# Altium PCB JacdacDevRgbEc30 117.PcbDoc (part 1 of 2)
Units mm, origin at the board's own origin, x right, y up, seen from the top; angles counter-clockwise.
Board outline 28 x 25 mm, 2 copper layers (Top Layer, Bottom Layer), stack 1.525 mm thick; 29 components, 28 nets, 109 pads, 40 vias.
Unrouted connection lines stored in the file: 10.
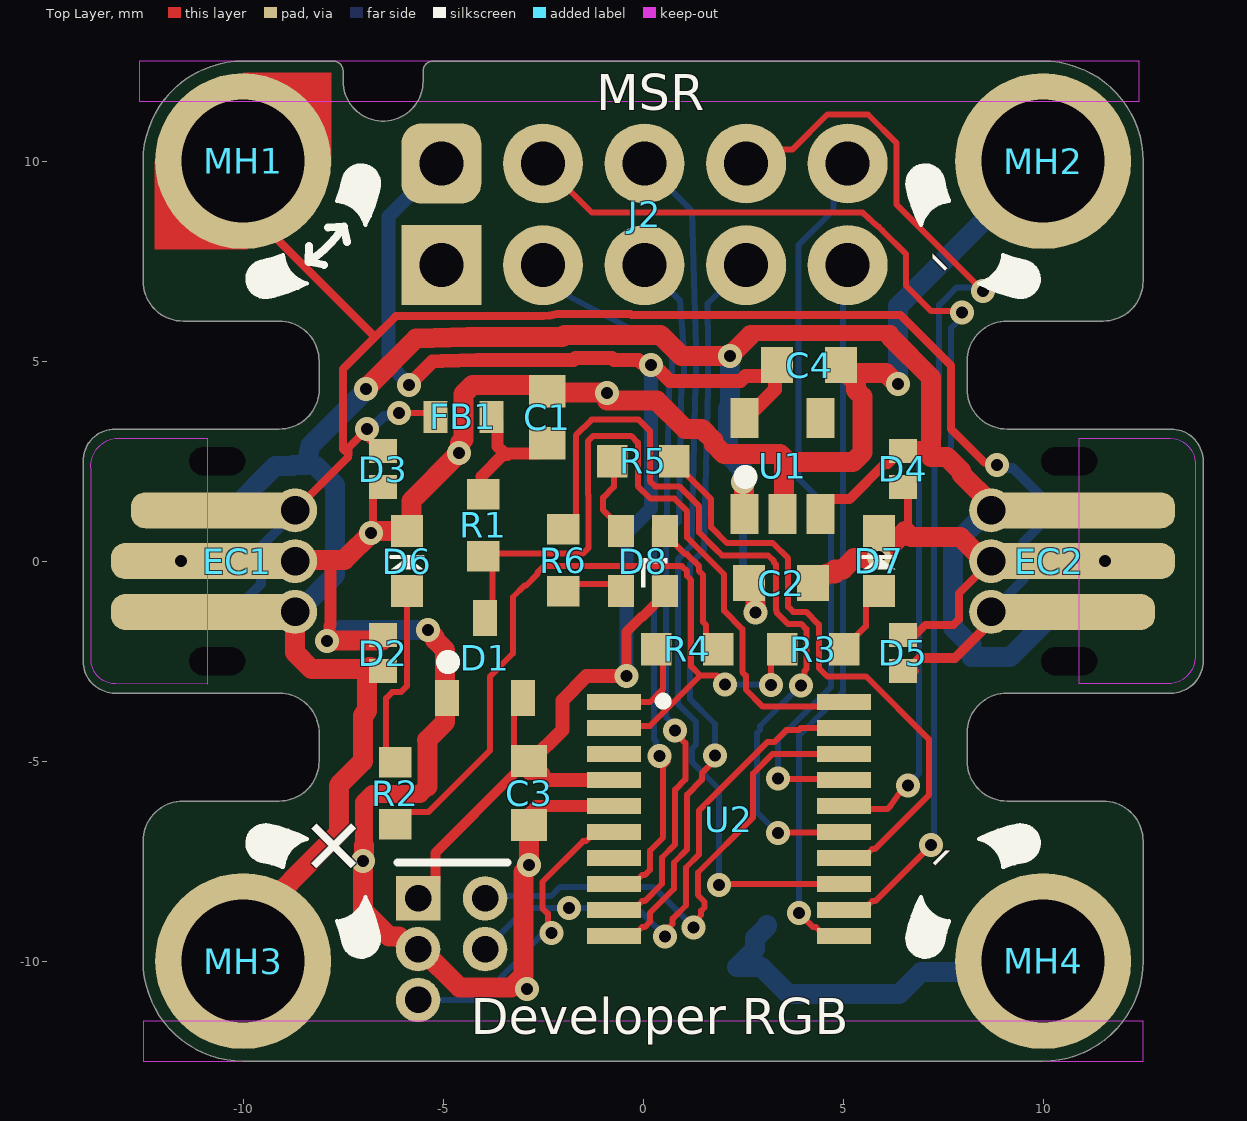
[diagram p0: Top Layer view]
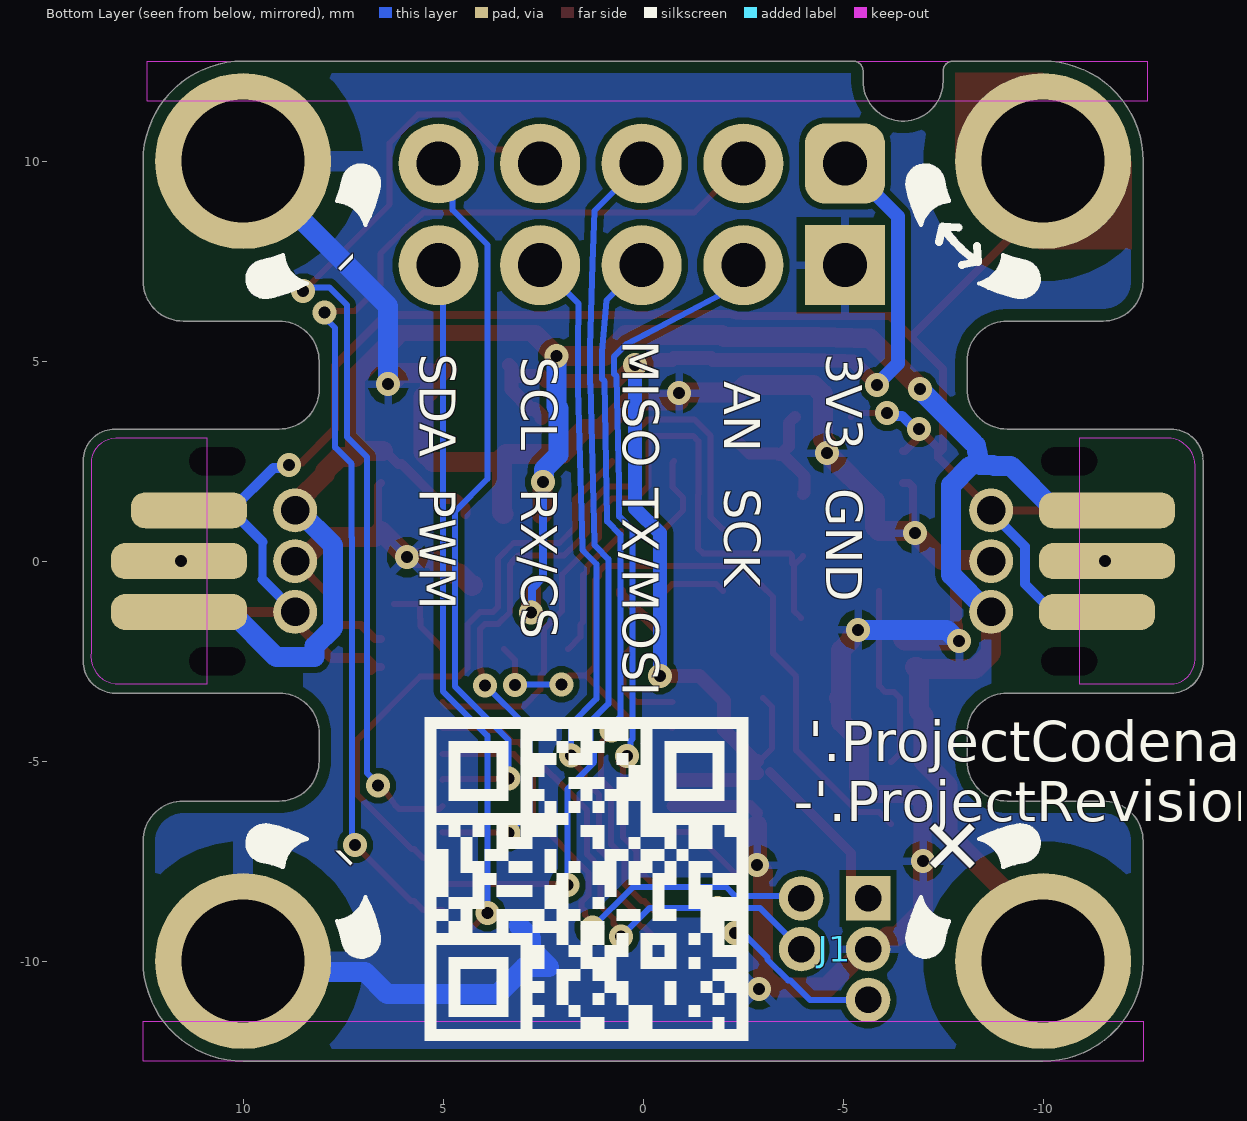
[diagram p1: Bottom Layer view, seen from below]

## Layer stack, top to bottom
Top Solder: solder mask 0.0102, Solder Resist, Dk 3.5
Top Layer: signal copper 0.0356
Dielectric 1: core 1.454, FR-4, Dk 4.2
Bottom Layer: signal copper 0.0356
Bottom Solder: solder mask 0.0102, Solder Resist, Dk 3.5

## Board outline
-12.5,-10 ccw(c-10,-10) -10,-12.5 10,-12.5 ccw(c10,-10) 12.5,-10 12.5,-7 ccw(c11.5,-7) 11.5,-6 9.1,-6 cw(c9.1,-5) 8.1,-5 8.1,-4.3 cw(c9.1,-4.3) 9.1,-3.3 13.2,-3.3 ccw(c13.2,-2.5) 14,-2.5 14,2.5 ccw(c13.2,2.5) 13.2,3.3 9.1,3.3 9.098,3.3 cw(c9.098,4.3) 8.098,4.3 8.1,4.3 8.1,5 cw(c9.1,5) 9.1,6 11.5,6 ccw(c11.5,7) 12.5,7 12.5,10 ccw(c10,10) 10,12.5 -5.25,12.5 ccw(c-5.25,12.25) -5.5,12.25 -5.5,12 cw(c-6.5,12) -7.5,12 -7.5,12.25 ccw(c-7.75,12.25) -7.75,12.5 -10,12.5 ccw(c-10,10) -12.5,10 -12.5,6.97 -12.5,7 ccw(c-11.5,7) -11.5,6 -9.1,6 cw(c-9.1,5) -8.1,5 -8.1,4.3 -8.098,4.3 cw(c-9.098,4.3) -9.098,3.3 -9.1,3.3 -13.2,3.3 ccw(c-13.2,2.5) -14,2.5 -14,2.47 -14,-2.47 -14,-2.5 ccw(c-13.2,-2.5) -13.2,-3.3 -9.1,-3.3 cw(c-9.1,-4.3) -8.1,-4.3 -8.1,-5 cw(c-9.1,-5) -9.1,-6 -11.5,-6 ccw(c-11.5,-7) -12.5,-7 -12.5,-6.97

## Design rules (kind name [scope] priority, off if disabled: settings)
AssemblyTestPointUsage [All] p1: valid=2
BoardOutlineClearance [not (HasFootprint('MOUSEBITE_CONNECTOR_3X2') or HasFootprint('MOUSEBITE_NOCONNECTOR_3'))] p1: gap=0.3 ignorepadtopadclearanceinfootprint=FALSE except(0: Arc-SplitContinuation Track-SplitContinuation SMDPad-SplitContinuation THPad-SplitContinuation Via-SplitContinuation Fill-SplitContinuation Poly-SplitContinuation Text-OutlineEdge Text-CavityEdge Text-CutoutEdge Text-SplitBarrior Text-SplitContinuation; 0.15: Region-OutlineEdge Region-CavityEdge Region-CutoutEdge Region-SplitBarrior Region-SplitContinuation)
Clearance "Clearance MH" [InComponent('MH1') OR InComponent('MH2') OR InComponent('MH3') OR InComponent('MH4')] p1: gap=0.15 ignorepadtopadclearanceinfootprint=FALSE except(0.254: Arc-Hole Track-Hole SMDPad-Hole THPad-Hole Via-Hole Fill-Hole Poly-Hole Region-Hole Text-Hole; 0.8: Arc-Fill Arc-Poly Arc-Region Track-Fill Track-Poly Track-Region SMDPad-Fill SMDPad-Poly SMDPad-Region THPad-Fill THPad-Poly THPad-Region Via-Fill Via-Poly Via-Region Fill-Fill Fill-Poly Fill-Region Poly-Poly Poly-Region Region-Region)
Clearance [All] p2: gap=0.15 ignorepadtopadclearanceinfootprint=FALSE except(0.254: Arc-Hole Track-Hole SMDPad-Hole THPad-Hole Via-Hole Fill-Hole Poly-Hole Region-Hole Text-Hole)
ComponentClearance [All] p1: gap=0.01 collisioncheckmode=3 verticalgap=0.2 showdistances=FALSE
DiffPairsRouting [All] p1: maxlimit=2 minlimit=0.15 mostfreqgap=0.15 toplayer_minwidth=0.15 toplayer_maxwidth=2 toplayer_prefwidth=0.15 bottomlayer_minwidth=0.15 bottomlayer_maxwidth=2 bottomlayer_prefwidth=0.15 substack1={CB9D278B-8BF5-444A-AAF4-837A2A9DF42D} toplayer_{cb9d278b-8bf5-444a-aaf4-837a2a9df42d}_minwidth=0.381 toplayer_{cb9d278b-8bf5-444a-aaf4-837a2a9df42d}_maxwidth=0.381 toplayer_{cb9d278b-8bf5-444a-aaf4-837a2a9df42d}_prefwidth=0.381 bottomlayer_{cb9d278b-8bf5-444a-aaf4-837a2a9df42d}_minwidth=0.381 bottomlayer_{cb9d278b-8bf5-444a-aaf4-837a2a9df42d}_maxwidth=0.381 bottomlayer_{cb9d278b-8bf5-444a-aaf4-837a2a9df42d}_prefwidth=0.381 substack2={826B8647-A721-4255-895A-19F9591B9CD1} toplayer_{826b8647-a721-4255-895a-19f9591b9cd1}_minwidth=0.381 toplayer_{826b8647-a721-4255-895a-19f9591b9cd1}_maxwidth=0.381 toplayer_{826b8647-a721-4255-895a-19f9591b9cd1}_prefwidth=0.381 bottomlayer_{826b8647-a721-4255-895a-19f9591b9cd1}_minwidth=0.381 bottomlayer_{826b8647-a721-4255-895a-19f9591b9cd1}_maxwidth=0.381 bottomlayer_{826b8647-a721-4255-895a-19f9591b9cd1}_prefwidth=0.381 substack3={E64FCAF4-1BC8-437D-B1E0-0E5F2DC0F59E} toplayer_{e64fcaf4-1bc8-437d-b1e0-0e5f2dc0f59e}_minwidth=0.381 toplayer_{e64fcaf4-1bc8-437d-b1e0-0e5f2dc0f59e}_maxwidth=0.381 toplayer_{e64fcaf4-1bc8-437d-b1e0-0e5f2dc0f59e}_prefwidth=0.381 bottomlayer_{e64fcaf4-1bc8-437d-b1e0-0e5f2dc0f59e}_minwidth=0.381 bottomlayer_{e64fcaf4-1bc8-437d-b1e0-0e5f2dc0f59e}_maxwidth=0.381 bottomlayer_{e64fcaf4-1bc8-437d-b1e0-0e5f2dc0f59e}_prefwidth=0.381 substack4={E61CE66C-507C-4E1E-8E83-C905434AFC1C} toplayer_{e61ce66c-507c-4e1e-8e83-c905434afc1c}_minwidth=0.381 toplayer_{e61ce66c-507c-4e1e-8e83-c905434afc1c}_maxwidth=0.381 toplayer_{e61ce66c-507c-4e1e-8e83-c905434afc1c}_prefwidth=0.381 bottomlayer_{e61ce66c-507c-4e1e-8e83-c905434afc1c}_minwidth=0.381 bottomlayer_{e61ce66c-507c-4e1e-8e83-c905434afc1c}_maxwidth=0.381 bottomlayer_{e61ce66c-507c-4e1e-8e83-c905434afc1c}_prefwidth=0.381 maxuncoupledlength=25
FabricationTestPointUsage [All] p1: valid=2 allowmultiple=FALSE
HoleSize [All] p1: absolutevalues=TRUE maxlimit=5 minlimit=0.3 maxpercent=80.000 minpercent=20.000
HoleToHoleClearance [IsPad and not (HasFootprint('MOUSEBITE_CONNECTOR_3X2') or HasFootprint('MOUSEBITE_NOCONNECTOR_3')) vs IsPad and not  (HasFootprint('MOUSEBITE_CONNECTOR_3X2') or HasFootprint('MOUSEBITE_NOCONNECTOR_3'))] p1: gap=0.5 allowstackedmicrovias=TRUE
MinimumAnnularRing [All] p1: minimumring=0.15
MinimumSolderMaskSliver [All] p1: minsoldermaskwidth=0.005
PlaneClearance [All] p1: clearance=0.3
PlaneConnect [All] p1: planeconnectstyle=Relief reliefexpansion=0.5 reliefentries=4 reliefconductorwidth=0.2 reliefairgap=0.3
PolygonConnect "PolygonConnect MH" [InComponent('MH1') OR InComponent('MH2') OR InComponent('MH3') OR InComponent('MH4')] p1: connectstyle=Relief reliefconductorwidth=0.5 reliefentries=4 polygonreliefangle="90 Angle" airgapwidth=0.8
PolygonConnect [All] p2: connectstyle=Relief reliefconductorwidth=0.2 reliefentries=4 polygonreliefangle="90 Angle" airgapwidth=0.2
RoutingVias [All] p1: holewidth=0.3 width=0.6 viastyle="Through Hole" minholewidth=0.3 minwidth=0.6 maxholewidth=0.3 maxwidth=0.8
SilkToSilkClearance [All] p1: silktosilkclearance=0.001
SilkToSolderMaskClearance [IsPad] p1: minsilkscreentomaskgap=0.05 clearancetoexposedcopper=TRUE
SolderMaskExpansion [All] p1: expansion=0.075 istentingtop=FALSE
UnRoutedNet [All] p1: checkbadconnections=TRUE
Width [All] p1: maxlimit=2 minlimit=0.15 preferedwidth=0.15 substack1={CB9D278B-8BF5-444A-AAF4-837A2A9DF42D} substack2={826B8647-A721-4255-895A-19F9591B9CD1} substack3={E64FCAF4-1BC8-437D-B1E0-0E5F2DC0F59E} substack4={E61CE66C-507C-4E1E-8E83-C905434AFC1C} minimp=50.000000 maximp=50.000000 favimp=50.000000
18 further rules are at their usual default settings.

## Components (designator, comment, footprint, x,y, rotation, side; value= is the part's Value field where it differs from the comment)
C1 "33pF" CC0603 -2.4,3.6 r270 top
C2 "1uF 16V" "C0603 - without outline" 3.45,-0.55 r180 top
C3 "1uF 16V" "C0603 - without outline" -2.85,-5.8 r90 top
C4 "1uF 16V" "C0603 - without outline" 4.15,4.9 r180 top
D1 "BAT54S" "NXP-BAT54S-TO-236AB - without outline" -3.95,-2.423 r90 top
D2 "RCLAMP0521P-N" "TVS 0402 - XL" -6.5,-2.3 r90 top
D3 "RCLAMP0521P-N" "TVS 0402 - XL" -6.5,2.3 r270 top
D4 "RCLAMP0521P-N" "TVS 0402 - XL" 6.5,2.3 r270 top
D5 "RCLAMP0521P-N" "TVS 0402 - XL" 6.5,-2.3 r90 top
D6 "Everlight Elec'''" "0603 Orange" -5.9,0 r270 top
D7 "Everlight Elec'''" "0603 Orange" 5.9,0 r270 top
D8 "TZ-P4-1615RGBTCA1-0.55T" TZ-P4-1615RGBTCA1-0.55T 0,0 r90 top
EC1 "3 pin JACDAC edge connector" JACDAC_EDGE_CONNECTOR_NO_TRACES -8.15,0 r90 top
EC2 "3 pin JACDAC edge connector" JACDAC_EDGE_CONNECTOR_NO_TRACES 8.15,0 r270 top
FB1 "TDK MPZ1608S102ATA00" "TDK MPZ1608 0.8mm - without outline" -4.494,3.607 r0 top
J1 "Hack Connect Mini 1.27 mm pitch 2-row" HACK_CONNECT_MINI_5_X_1_27 -5.626,-8.43 r0 bottom
J2 "0.1\"" "Generic 2x5 2.54mm header" -1.235,8.67 r180 top
MH1 "MH_7.0MMK_4.4MMC_3.1MMD_PTH" MH_7.0MMK_4.4MMC_3.1MMD_PTH -10,10 r90 top
MH2 "MH_7.0MMK_4.4MMC_3.1MMD_PTH" MH_7.0MMK_4.4MMC_3.1MMD_PTH 10,10 r90 top
MH3 "MH_7.0MMK_4.4MMC_3.1MMD_PTH" MH_7.0MMK_4.4MMC_3.1MMD_PTH -10,-10 r90 top
MH4 "MH_7.0MMK_4.4MMC_3.1MMD_PTH" MH_7.0MMK_4.4MMC_3.1MMD_PTH 10,-10 r90 top
R1 "220R" RC0603 -4,0.9 r270 top
R2 "150R" RC0603 -6.2,-5.8 r90 top
R3 "150R" RC0603 4.25,-2.2 r0 top
R4 "30R" RC0603 1.1,-2.2 r180 top
R5 "30R" RC0603 0,2.5 r0 top
R6 "150R" RC0603 -2,0.025 r90 top
U1 "3.3V LDO (see BOM)" MICRONE-SOT23-5 3.485,2.378 r90 top
U2 "STM32G0 (see BOM)" 20-TSSOP 2.146,-6.45 r0 top

## Footprints (in the part's own frame and the unit in brackets; to place one, negate y for a bottom-side part, rotate by r counter-clockwise, add the part's x,y. Pads: shape width x height; smd on the part's side, far side on the other; paste and mask are expansions set on the pad)
20-TSSOP [mm] "0.173\", 4.40mm Width"
  rect 1.35x0.4 smd: 1(-2.875,2.925) 2(-2.875,2.275) 3(-2.875,1.625) 4(-2.875,0.975) 5(-2.875,0.325) 6(-2.875,-0.325) 7(-2.875,-0.975) 8(-2.875,-1.625) 9(-2.875,-2.275) 10(-2.875,-2.925) 11(2.875,-2.925) 12(2.875,-2.275) 13(2.875,-1.625) 14(2.875,-0.975) 15(2.875,-0.325) 16(2.875,0.325) 17(2.875,0.975) 18(2.875,1.625) 19(2.875,2.275) 20(2.875,2.925)
  silkscreen extent -1.73,2.87 -1.56,3.03, body extent -3.3,-3.3 3.3,3.3, height 1.2
"0603 Orange" [mm]
  rect 0.8x0.8 smd paste-0.05: 1(-0.75,0) 2(0.75,0)
  silkscreen extent -0.1,-0.4 0.2,0.4, body extent -0.79,-0.4 0.81,0.4, height 0.4
"C0603 - without outline" [mm]
  rect 0.8x0.9 smd: 1(-0.8,0) 2(0.8,0)
  body extent -0.9,-0.5 0.9,0.5, height 0.9
CC0603 [mil]
  rect 32x36 smd: 1(-25.5,0) 2(25.5,0)
  body extent -33,-18 34,18, height 36
"Generic 2x5 2.54mm header" [mm] "5x2 2.54mm 0.1\" header vertical th"
  rect 2x2 hole 1.1: 1(3.81,1.27)
  rrect50% 2x2 hole 1.1: 2(3.81,-1.27)
  round 2 hole 1.1: 3(1.27,1.27) 4(1.27,-1.27) 5(-1.27,1.27) 6(-1.27,-1.27) 7(-3.81,1.27) 8(-3.81,-1.27) 9(-6.35,1.27) 10(-6.35,-1.27)
  body extent -7.62,-2.54 5.08,2.54, height 8.65
HACK_CONNECT_MINI_5_X_1_27 [mm] "5 pins, 1.27mm x 1.676mm pitch"
  rect 1.11x1.11 hole 0.66: 1(0,0)
  round 1.11 hole 0.66: 2(1.676,0) 3(0,1.27) 4(1.676,1.27) 5(0,2.54)
JACDAC_EDGE_CONNECTOR_NO_TRACES [mm] "Jacdac 3 pin connector with no traces"
  rrect78% 0.9x2.9 smd far side paste-1 mask+0: 1(-1.27,3.2)
  rrect78% 0.9x4.3 smd paste-1 mask+0: 1(1.27,2.5)
  round 1.1 hole 0.71 paste-0.254 mask+0: 1(1.27,0.55) 2(0,0.55) 3(-1.27,0.55)
  rrect78% 0.9x3.4 smd far side paste-1 mask+0: 2(0,3.45) 2(0,3.45) 3(1.27,3.45)
  rrect78% 0.9x4.8 smd paste-1 mask+0: 2(0,2.75) 3(-1.27,2.75)
  round 0 hole 0.7 slot 1.4 at 90 deg unplated: ""(-2.5,2.5) ""(2.5,2.5)
  Top Layer keep-out region: -3.075,2.75 -3.07,5.033 -2.987,5.341 -2.761,5.567 -2.453,5.65 -2.453,5.65 2.27,5.65 2.545,5.635 2.794,5.516 2.978,5.31 3.07,5.05 3.07,5.05 3.07,2.75
  Bottom Layer lines w0.2: -1.27,0.85 -1.126,0.85
  Bottom Layer keep-out region: -3.07,2.75 -3.07,5.033 -3.023,5.269 -2.889,5.469 -2.689,5.603 -2.453,5.65 -2.453,5.65 2.27,5.65 2.546,5.635 2.794,5.516 2.978,5.31 3.07,5.05 3.07,5.05 3.07,2.75
MH_7.0MMK_4.4MMC_3.1MMD_PTH [mm] "Jacdac mounting hole 7.0mm clearance, 4.4 annualar ring and 3.1mm PTH"
  round 4.4 hole 3.08 mask+0.3: 1(0,0)
MICRONE-SOT23-5 [mm]
  rect 1x0.7 smd: 1(-1.2,0.95) 2(-1.2,0) 3(-1.2,-0.95) 4(1.2,-0.95) 5(1.2,0.95)
  silkscreen extent -0.32,0.87 -0.23,0.97, body extent -1.32,-1.5 1.32,1.5, height 1.11
"NXP-BAT54S-TO-236AB - without outline" [mm] "SOT23, 3-Leads, Body 2.90x2.30mm, Pitch 0.95mm, IPC Medium Density"
  rect 0.9x0.6 smd: 1(-1,0.95) 2(-1,-0.95) 3(1,0)
  silkscreen extent -0.15,0.87 -0.05,0.97, body extent -1.32,-1.5 1.32,1.5, height 1.12
RC0603 [mil]
  rect 30x32 smd: 1(-30.5,0) 2(30.5,0)
  body extent -31,-16 32,16, height 28
"TDK MPZ1608 0.8mm - without outline" [mm]
  rect 0.6x0.8 smd: 1(-0.7,0) 2(0.7,0)
  body extent -0.8,-0.4 0.8,0.4, height 0.8
"TVS 0402 - XL" [mm] "TVS 0402 RoHS"
  rect 0.6x0.7 smd paste-0.06 mask+0.05: 1(-0.45,0) 2(0.45,0)
  body extent -0.5,-0.3 0.5,0.3, height 0.5
TZ-P4-1615RGBTCA1-0.55T [mm] "1615 Light Emitting Diodes (LED) RoHS"
  rect 0.8x0.65 smd mask+0.05: 1(-0.75,-0.55) 2(-0.75,0.55) 3(0.75,0.55) 4(0.75,-0.55)
  silkscreen extent -0.65,-0.6 0.07,0.05, body extent -0.8,-0.75 0.8,0.75, height 0.55

## Part data
C1: library part CC0603JRNPO9BN330, "Cap 33PF 50V 0603 SMD 5% NP0", Case Code (Imperial)=0603, Case Code (Metric)=1608, Dielectric=C0G, Dielectric Material=Ceramic, Insulation Resistance=100GR, Manufacturer=Yageo, Max Operating Temperature=125°C, Min Operating Temperature=-55°C, Package Quantity=1, Supplier Part Number 1=311-1064-2-ND, Temperature Coefficient=30ppm/°C, Tolerance=5%, Voltage=50V, Capacitance=33pF, Case/Package=0603, Category="Ceramic Capacitors", ComponentLink1Description=https://datasheet.ciiva.com/11786/0900766b8079c870-11786082.pdf?src-supplier=RSComponents, ComponentLink1URL=https://datasheet.ciiva.com/11786/0900766b8079c870-11786082.pdf?src-supplier=RSComponents, ComponentLink2Description="Online part number coding", ComponentLink2URL=https://datasheet.ciiva.com/144/mlccorderingcode-144075.pdf?src-supplier=Digi-Key, ComponentLink3Description="Online datasheet", ComponentLink3URL=https://datasheet.ciiva.com/17434/upy-gphc-x7r-6-3v-to-50v-8-17434263.pdf, ComponentLink4Description="Online datasheet", ComponentLink4URL=https://datasheet.ciiva.com/26829/getdatasheetpartid-403577-26829431.pdf, ComponentLink5Description=https://datasheet.ciiva.com/26862/getdatasheetpartid-403532-26862767.pdf?src-supplier=Verical, ComponentLink5URL=https://datasheet.ciiva.com/26862/getdatasheetpartid-403532-26862767.pdf?src-supplier=Verical, ComponentLink6Description=https://datasheet.ciiva.com/8033/1443161-8033735.pdf?src-supplier=Element14, ComponentLink6URL=https://datasheet.ciiva.com/8033/1443161-8033735.pdf?src-supplier=Element14, ComponentLink7Description=https://datasheet.ciiva.com/7978/1443161-7978142.pdf?src-supplier=Element14, ComponentLink7URL=https://datasheet.ciiva.com/7978/1443161-7978142.pdf?src-supplier=Element14, ComponentLink8Description=https://datasheet.ciiva.com/46430/1835847-46430155.pdf?src-supplier=Element14, ComponentLink8URL=https://datasheet.ciiva.com/46430/1835847-46430155.pdf?src-supplier=Element14, ComponentLink9Description=https://datasheet.ciiva.com/144/mlccorderingcode-144644.pdf?src-supplier=Digi-Key, ComponentLink9URL=https://datasheet.ciiva.com/144/mlccorderingcode-144644.pdf?src-supplier=Digi-Key, ComponentLink10Description=https://datasheet.ciiva.com/144/mlccorderingcode-144643.pdf?src-supplier=Digi-Key, ComponentLink10URL=https://datasheet.ciiva.com/144/mlccorderingcode-144643.pdf?src-supplier=Digi-Key, ComponentLink11Description=https://datasheet.ciiva.com/144/mlccorderingcode-144645.pdf?src-supplier=Digi-Key, ComponentLink11URL=https://datasheet.ciiva.com/144/mlccorderingcode-144645.pdf?src-supplier=Digi-Key, ComponentLink12Description=https://datasheet.ciiva.com/5426/upy-gp-np0-16v-to-50v-8-5426614.pdf?src-supplier=Mouser, ComponentLink12URL=https://datasheet.ciiva.com/5426/upy-gp-np0-16v-to-50v-8-5426614.pdf?src-supplier=Mouser, ComponentLink13Description=https://datasheet.ciiva.com/8033/1372269-8033734.pdf?src-supplier=Element14, ComponentLink13URL=https://datasheet.ciiva.com/8033/1372269-8033734.pdf?src-supplier=Element14, ComponentLink14Description=https://datasheet.ciiva.com/11464/upy-gp-np0-16v-to-50v-8-11464730.pdf?src-supplier=Avnet, ComponentLink14URL=https://datasheet.ciiva.com/11464/upy-gp-np0-16v-to-50v-8-11464730.pdf?src-supplier=Avnet, Depth=0.8mm, Height=0.8mm, Lead Free="Lead Free", Length=1.6mm, Manufacturer 1=Yageo, Manufacturer Part Number=CC0603JRNPO9BN330, Manufacturer Part Number 1=CC0603JRNPO9BN330, Mount="Surface Mount", Number of Pins=2, Packaging="Tape and Reel", Pricing 1="4000=0.00888, 8000=0.00811 (USD)", Radiation Hardening=No, REACH SVHC="No SVHC", Resistor Type=Ceramic, RoHS=Yes, RoHS Compliant=Yes, Series=CC, Stock 1=422723, Supplier 1=Digi-Key, Supplier 2=Farnell, Supplier 3=RSComponents, Supplier 4=Mouser, Supplier 5=LCSC, Supplier Part Number 2=2408499, Supplier Part Number 3=2006492, Supplier Part Number 4=603-C0603JRNPO9BN330, Supplier Part Number 5=C107047, Termination=SMD/SMT, Thickness=0.035inch, Voltage Rating=50V, Voltage Rating (DC)=50V, Width=0.031inch
C2 C3 C4: library part CL10A105KO8NNNC, "SMD Multilayer Ceramic Capacitor, 1 µF, 16 V, 0603 [1608 Metric], ± 10%, X5R, CL Series", Capacitance=1uF, Case Code (Imperial)=0603, Case Code (Metric)=1608, Dielectric=X5R, Manufacturer=Samsung, Max Operating Temperature=85°C, Min Operating Temperature=-55°C, Package Quantity=1, Supplier Part Number 1=1276-1034-1-ND, Tolerance=10%, Voltage=16V, Case/Package=0603, Category="Ceramic Capacitors", ComponentLink1Description="Online datasheet", ComponentLink1URL=https://datasheet.lcsc.com/lcsc/1811021622_Samsung-Electro-Mechanics-CL10A105KO8NNNC_C1592.pdfq, Construction=Flat, Contact Plating=Tin, Depth=0.8mm, Height=0.8mm, Lead Free="Lead Free", Length=1.6mm, Manufacturer 1=Samsung, Manufacturer Part Number=CL10A105KO8NNNC, Manufacturer Part Number 1=CL10A105KO8NNNC, Material=Ceramic, Mount="Surface Mount", Packaging="Tape and Reel", Pricing 1="1=0.10000, 10=0.03600, 50=0.01960, 100=0.01600, 500=0.01144, 1000=0.00898 (USD)", Radiation Hardening=No, RoHS=Yes, RoHS Compliant=Yes, Series=CL, Stock 1=3575337, Supplier 1=Digi-Key, Supplier 2=Farnell, Supplier 3=RSComponents, Supplier 4=Mouser, Supplier 5=LCSC, Supplier Part Number 2=3013384, Supplier Part Number 3=7664780, Supplier Part Number 4=187-CL10A105KO8NNNC, Supplier Part Number 5=C1592, Thickness=0.035inch, Voltage Rating=16V, Voltage Rating (DC)=16V, Width=0.031inch
D1: "DIODE ARRAY SCHOTTKY 30V SOT23", Manufacturer=Nexperia, Supplier Part Number 1=1727-1868-1-ND, Category="Rectifier Diodes", ComponentLink1Description="NXP datasheet online", ComponentLink1URL=https://assets.nexperia.com/documents/data-sheet/BAT54_SER.pdf, Manufacturer 1=Nexperia, Manufacturer Part Number=BAT54S, Manufacturer Part Number 1=BAT54S, Pricing 1="1=0.13000, 10=0.11900, 100=0.05610, 500=0.03326, 1000=0.02185, 5000=0.02138 (USD)", RoHS=No, Stock 1=14011, Supplier 1=Digi-Key, Supplier 2=Mouser, Supplier 3=RSComponents, Supplier Part Number 2=771-BAT54S235, Supplier Part Number 3=1707990
D2 D4 D5: "Bidirectional 5V (Max) 6V 16V 3.5A (8/20us) 0402 TVS RoHS", Manufacturer="Born Semiconductor", Package=0402, Supplier Part Number 1=C316043, Checked By=?, ComponentLink1Description="Online datasheet", ComponentLink1URL=https://datasheet.lcsc.com/szlcsc/Bourne-Semicon-Shenzhen-RCLAMP0521P-N_C316043.pdf, Created By="D Gakure", Manufacturer 1="Born Semiconductor", Manufacturer Part Number=RCLAMP0521P-N, Manufacturer Part Number 1=RCLAMP0521P-N, Supplier 1=LCSC
D3: "Bidirectional 5V (Max) 6V 16V 3.5A (8/20us) 0402 TVS RoHS", Manufacturer="Born Semiconductor", Manufacturer Part Number="RCLAMP0521 (see BOM)", Package=0402, Supplier Part Number 1=C316043, Checked By=?, ComponentLink1Description="Online datasheet", ComponentLink1URL=https://datasheet.lcsc.com/szlcsc/Bourne-Semicon-Shenzhen-RCLAMP0521P-N_C316043.pdf, Created By="D Gakure", Manufacturer 1="Born Semiconductor", Manufacturer Part Number 1="RCLAMP0521 (see BOM)", Supplier 1=LCSC
D6 D7: library part 19-217/S2C-AQ1R1B/3T, "LED ORANGE DIFFUSED 0603 SMD", Case Code (Imperial)=0603, Color=Orange, Manufacturer="Everlight Elec", Supplier Part Number 1=C146215, Case/Package=0603, Colour=Orange, ComponentLink1Description="Online datasheet", ComponentLink1URL=https://datasheet.lcsc.com/lcsc/1912171731_Everlight-Elec-19-217-S2C-AQ1R1B-3T_C146215.pdf, Manufacturer 1="Everlight Elec", Manufacturer Part Number=19-217/S2C-AQ1R1B/3T, Manufacturer Part Number 1=19-217/S2C-AQ1R1B/3T, Mount="Surface Mount", Supplier 1=LCSC
D8: "1615 Light Emitting Diodes (LED) RoHS", Manufacturer=TUOZHAN, Package=1615, Supplier Part Number 1=C779813, Category=Optoelectronics, Checked By=?, ComponentLink1Description="Online datasheet", ComponentLink1URL=https://datasheet.lcsc.com/szlcsc/2009041238_TUOZHAN-TZ-P4-1615RGBTCA1-0-55T_C779813.pdf, Created By="D. Gakure", Manufacturer 1=TUOZHAN, Manufacturer Part Number=TZ-P4-1615RGBTCA1-0.55T, Manufacturer Part Number 1=TZ-P4-1615RGBTCA1-0.55T, Packaging="Tape & Reel (TR)", RoHS="RoHS Compliant", Size / Dimension=1.6x1.5mm, Supplier 1=LCSC
EC1 EC2: library part "Jacdac edge connector", "3 pin Jacdac edge connector 1.27mm pitch", Manufacturer Part Number=JACDAC_EDGE_CONNECTOR, Checked By=?, ComponentLink1Description="Yuliang JACDAC cable connector drawing online", ComponentLink1URL=https://github.com/microsoft/jacdac-mdk/blob/main/connector/JACDAC-Connector-by-Yuliang-2020-11-28.pdf, ComponentLink2Description="JACDAC PCB edge connector spec onlin", ComponentLink2URL=https://github.com/microsoft/jacdac-mdk/blob/main/connector/JACDAC_PCB_Edge_Connector_Drawing_JD-PEC-01_rev_01.pdf, Created By="D. Gakure", Manufacturer Part Number 1=JACDAC_EDGE_CONNECTOR, PCB Type="1.6mm FR4"
FB1: "0603 1k@100MHz 0.8A chip", Case Code (Imperial)=0603, Case Code (Metric)=1608, Current Rating=800mA, DC Resistance (DCR)=300mR, Manufacturer=TDK, Manufacturer Part Number=MPZ1608S102ATA00, Package Quantity=4000, Supplier Part Number 1=445-8694-1-ND, Tolerance=25%, Case/Package=0603, ComponentLink2Description="datasheet online", ComponentLink2URL=https://www.mouser.co.uk/datasheet/2/400/eads_commercial_power_mpz1608_en-923650.pdf, ComponentLink3Description=datasheet, ComponentLink3URL="Y:\System\Altium\Libraries 2014\TDK\Datasheets\eads_commercial_power_mpz1608_en-923650.pdf", Core Material=Ferrite, Height=0.037inch, Impedance="1kR @ 100MHz", Length=0.063inch, Manufacturer 1=TDK, Manufacturer Part Number 1=MPZ1608S102ATA00, Max DC Current=800mA, Mount="Surface Mount", Packaging="Tape and Reel", Pricing 1="1=0.1, 10=0.079, 25=0.0716, 50=0.0644, 100=0.0472, 250=0.03432, 500=0.03146, 1000=0.02717 (USD)", Stock 1=113542, Supplier 1=Digi-Key, Supplier 2=Mouser, Supplier Part Number 2=810-MPZ1608S102ATA00, Width=0.031inch
J1: library part HACK_CONNECT_MINI
J2: library part "Header Multicomp 2213S-10G-whitesch", "2.54mm, 5x2 way, vertical, square pin, gold plate", Flammability Rating="UL94 V-0", Insulation Resistance=1GR, Manufacturer=Multicomp, Manufacturer Part Number=2213S-10G, Supplier Part Number 1=1593442, ComponentLink1Description="mulitcomp datasheet", ComponentLink1URL=http://www.farnell.com/datasheets/1697530.pdf, Contact Material="Copper Alloy", Contact Plating=Gold, Gender=Male, Height=0.47inch, Length=0.51inch, Mount="Through Hole", Number of Contacts=10, Number of Rows=2, Pricing 1="50=0.05290, 500=0.03900, 1500=0.03370, 2500=0.02750, 5000=0.02660, 10000=0.02550, 30000=0.02460, 50000=0.02360 (GBP)", REACH SVHC="No SVHC", RoHS=Yes, Stock 1=90304, Supplier 1=Farnell, Termination="Through Hole", Weight=0.11lb, Width=0.2inch
MH1 MH2 MH3 MH4: "Mounting Hole 7.0mm keepout, 4.4mm annualar ring and 3.1mm Drill PTH", Annular Ring=4.4mm, Hole Clearance=7.0mm, Hole Diameter=3.1mm, Hole Size=M3, Hole Type=PTH
R1: library part RC0603FR-07220RL, "Res Thick Film 0603 220 Ohm 1% 0.1W(1/10W) ±100ppm/°C Pad SMD T/R", Case Code (Imperial)=0603, Case Code (Metric)=1608, Manufacturer=Yageo, Max Operating Temperature=155°C, Max Power Dissipation=100mW, Min Operating Temperature=-55°C, Package Quantity=1, Resistance Tolerance=1%, Resistor Type="Thick Film", Supplier Part Number 1=311-220HRCT-ND, Temperature Coefficient=100ppm/°C, Voltage Rating=50V, Case/Package=0603, Category="Chip SMD Resistors", ComponentLink1Description="Online datasheet", ComponentLink1URL=https://datasheet.ciiva.com/11819/0900766b80f96399-11819290.pdf, Construction=Rectangular, Depth=0.8mm, Features="Moisture Resistant", Height=0.022inch, Lead Free="Lead Free", Length=1.6mm, Manufacturer 1=Yageo, Manufacturer Part Number=RC0603FR-07220RL, Manufacturer Part Number 1=RC0603FR-07220RL, Military Standard=Not, Number of Pins=2, Number of Terminations=2, Packaging="Tape and Reel", Power Rating=100mW, Pricing 1="1=0.10000, 10=0.02400, 100=0.00970, 1000=0.00436, 2500=0.00378 (USD)", REACH SVHC="No SVHC", Resistance=220R, RoHS=Yes, RoHS Compliant=Yes, Series=RC, Size Code=0603, Stock 1=242327, Supplier 1=Digi-Key, Supplier 2=Farnell, Supplier 3=RSComponents, Supplier 4=Mouser, Supplier 5=LCSC, Supplier Part Number 2=9238409, Supplier Part Number 3=1995497, Supplier Part Number 4=603-RC0603FR-07220RL, Supplier Part Number 5=C107696, Termination=SMD/SMT, Tolerance=1%, Voltage Rating (DC)=50V, Width=0.031inch
R2 R3 R6: library part RC0603FR-07150RL, "Res General Purpose Thick Film 0603 150 Ohm 1% 1/10W ±100ppm/°C Molded SMD Paper T/R", Case Code (Imperial)=0603, Case Code (Metric)=1608, Manufacturer=Yageo, Max Operating Temperature=155°C, Max Power Dissipation=100mW, Min Operating Temperature=-55°C, Package Quantity=5000, Resistance Tolerance=1%, Resistor Type="Thick Film", Supplier Part Number 1=311-150HRCT-ND, Temperature Coefficient=100ppm/°C, Voltage Rating=50V, Case/Package=0603, Category="Chip SMD Resistors", ComponentLink1Description="Online datasheet", ComponentLink1URL=https://datasheet.ciiva.com/11819/0900766b80f96399-11819290.pdf, Construction=Rectangular, Depth=0.8mm, Features="Moisture Resistant", Height=0.45mm, Lead Free="Lead Free", Length=1.6mm, Manufacturer 1=Yageo, Manufacturer Part Number=RC0603FR-07150RL, Manufacturer Part Number 1=RC0603FR-07150RL, Military Standard=Not, Number of Pins=2, Number of Terminations=2, Packaging="Tape and Reel", Power Rating=100mW, Pricing 1="1=0.10000, 10=0.02400, 100=0.00970, 1000=0.00436, 2500=0.00378 (USD)", REACH SVHC="No SVHC", Resistance=150R, RoHS=Yes, RoHS Compliant=Yes, Series=RC, Size Code=0603, Stock 1=2262542, Supplier 1=Digi-Key, Supplier 2=Farnell, Supplier 3=RSComponents, Supplier 4=Mouser, Supplier 5=LCSC, Supplier Part Number 2=9238387, Supplier Part Number 3=1995464, Supplier Part Number 4=603-RC0603FR-07150RL, Supplier Part Number 5=C114608, Termination=SMD/SMT, Tolerance=1%, Voltage Rating (DC)=50V, Width=0.8mm
R4 R5: library part RC0603FR-0730RL, "Res Thick Film 0603 30 Ohm 1% 0.1W(1/10W) ±100ppm/C Pad SMD T/R", Case Code (Imperial)=0603, Case Code (Metric)=1608, Manufacturer=Yageo, Max Operating Temperature=155°C, Max Power Dissipation=100mW, Min Operating Temperature=-55°C, Package Quantity=1, Resistor Type="Thick Film", Supplier Part Number 1=311-30.0HRCT-ND, Temperature Coefficient=100ppm/°C, Tolerance=1%, Voltage Rating=50V, Case/Package=0603, Category="Chip SMD Resistors", ComponentLink1Description="Online datasheet", ComponentLink1URL=https://datasheet.ciiva.com/11819/0900766b80f96399-11819290.pdf, ComponentLink2Description=https://datasheet.ciiva.com/11819/0900766b80c66297-11819676.pdf?src-supplier=RSComponents, ComponentLink2URL=https://datasheet.ciiva.com/11819/0900766b80c66297-11819676.pdf?src-supplier=RSComponents, ComponentLink3Description=https://datasheet.ciiva.com/2455/pyu-r-int-thick-7-2455119.pdf?src-supplier=Digi-Key, ComponentLink3URL=https://datasheet.ciiva.com/2455/pyu-r-int-thick-7-2455119.pdf?src-supplier=Digi-Key, ComponentLink4Description=https://datasheet.ciiva.com/2455/pyu-r-int-thick-7-2455120.pdf?src-supplier=Digi-Key, ComponentLink4URL=https://datasheet.ciiva.com/2455/pyu-r-int-thick-7-2455120.pdf?src-supplier=Digi-Key, ComponentLink5Description=https://datasheet.ciiva.com/2455/pyu-r-int-thick-7-2455121.pdf?src-supplier=Digi-Key, ComponentLink5URL=https://datasheet.ciiva.com/2455/pyu-r-int-thick-7-2455121.pdf?src-supplier=Digi-Key, Construction=Rectangular, Depth=0.8mm, Features="Moisture Resistant", Height=0.022inch, Lead Free="Lead Free", Length=0.063inch, Manufacturer 1=Yageo, Manufacturer Part Number=RC0603FR-0730RL, Manufacturer Part Number 1=RC0603FR-0730RL, Military Standard=Not, Mount="Surface Mount", Number of Terminations=2, Packaging="Tape and Reel", Power Rating=100mW, Pricing 1="1=0.10000, 10=0.02400, 100=0.00970, 1000=0.00436, 2500=0.00378 (USD)", Resistance=30R, RoHS=Yes, RoHS Compliant=Yes, Series=RC, Size Code=0603, Stock 1=181493, Supplier 1=Digi-Key, Supplier 2=Farnell, Supplier 3=Mouser, Supplier 5=LCSC, Supplier Part Number 2=3495813, Supplier Part Number 3=603-RC0603FR-0730RL, Supplier Part Number 5=C128060, Technology="THICK FILM", Termination=SMD/SMT, Voltage Rating (DC)=50V, Width=0.031inch
U1: library part ME6211C33M5G-N, "6V 260mV @ 200mA(typ) - - Fixed 3.3V SOT-23-5 Linear Voltage Regulators (LDO) ROHS", Case/Package=SOT-23-5, Dropout Voltage=200mV, Manufacturer="MICRONE(Nanjing Micro One Elec)", Max Input Voltage=6, Min Output Voltage=3.3V, Output Current=500mA, Supplier Part Number 1=C82942, Category="Voltage Regulators - Linear", Checked=?, ComponentLink3Description="On Semi datasheet online", ComponentLink3URL=https://datasheet.lcsc.com/lcsc/1811131510_MICRONE-Nanjing-Micro-One-Elec-ME6211C33M5G-N_C82942.pdf, Created=DG, Manufacturer 1="MICRONE(Nanjing Micro One Elec)", Manufacturer Part Number=ME6211C33M5G-N, Manufacturer Part Number 1=ME6211C33M5G-N, Mount="Surface Mount", Number of Regulators=1, Output Configuration=Positive, Output Type=Fixed, Pricing 1="1=0.33000, 10=0.24900, 25=0.21760, 100=0.12440, 250=0.11664, 500=0.09330, 1000=0.07153 (USD)", Stock 1=32529, Supplier 1=LCSC
U2: library part STM32G031F6P6, "MCU 32-Bit STM32G031 ARM Cortex-M0+ RISC 32KB Flash 1.7V to 3.6V 20-Pin TSSOP Tube", Manufacturer=STMicroelectronics, Supplier Part Number 1=497-19774-ND, Category=Microcontrollers, Checked By=?, ComponentLink1Description="Online datasheet", ComponentLink1URL=https://www.st.com/resource/en/datasheet/stm32g031c6.pdf, Created By="D. Gakure", Manufacturer 1=STMicroelectronics, Manufacturer Part Number=STM32G031F6P6, Manufacturer Part Number 1=STM32G031F6P6, Pricing 1="1=2.39000, 10=2.14400, 25=2.02240, 100=1.72330, 250=1.61808, 500=1.41582, 1000=1.17985 (USD)", Pricing 2="1480=0.78200 (GBP)", RoHS=Yes, Stock 1=166, Supplier 1=Digi-Key, Supplier 2=Farnell, Supplier 3=RSComponents, Supplier 4=LCSC, Supplier Part Number 2=3246918, Supplier Part Number 3=1939834, Supplier Part Number 4=C529333

## Via types
v1: diameter 0.6, hole 0.3, Top Layer to Bottom Layer, tented both sides, 40 vias

## Nets (pads, with @x,y where several pads share a name; then routed paths per layer and width w, separated by ;. In a path a pad name is that pad's centre, name@x,y a point inside that pad or via, vN(x,y) a via of type N, cw(c..) or ccw(c..) an arc to the next point about the centre after c; other vN are vias at no path point)
3V3: C3.2 C4.2 D1.2 D8.1 J1.1 J2.2 U1.5 U2.4 | length 40.7
  Top Layer w0.15: D1.2 -3.225,-3.648 -3.225,-4.675 -2.925,-4.975 -2.825,-4.975 -2.475,-5.325 C3.2@-2.475,-5.375 ; C3.2@-2.9,-4.95 C3.2
  Top Layer w0.25: J1.1 -5.196,-8 -5.196,-7.296 C3.2@-3.175,-5.275 ; v1(-0.417,-2.875) -0.417,-1.766 -0.03,-1.379 -0.004,-1.379 0.55,-0.825 D8.1
  Top Layer w0.35: v1(-5.849,4.407) -5.363,4.893 -5.263,4.993 -5.028,4.998 -4.139,5.025 -1.746,5.025 -1.696,5.075 -0.774,5.075 -0.724,5.025 -0.116,5.025 -0.039,4.948 0.152,4.948 v1(0.2,4.9) 0.268,4.9 0.668,4.5 2.43,4.5 2.555,4.625 C4.2@3.125,4.625 ; C3.2@-2.85,-5.3 C3.2@-2.5,-5.3 ; C3.2 -2.8,-5 -2.018,-4.218 -2.018,-3.479 -1.414,-2.875 v1(-0.417,-2.875) ; C3.2@-2.475,-5.375 -2.375,-5.475 U2.4 ; U1.5 2.535,3.628 2.71,3.803 2.81,3.803 3.292,4.285 3.292,4.625 3.292,4.842 C4.2
  Bottom Layer w0.35: v1(-5.849,4.407) -5.849,4.417 -6.37,4.938 -6.37,8.615 J2.2 ; v1(-0.417,-2.875) -0.417,0.704 0.2,1.321 v1(0.2,4.9)
AN: J2.4 U2.12 | length 29
  Top Layer w0.15: J2.4 -1.28,8.715 5.487,8.715 5.874,8.362 5.886,8.362 5.981,8.266 6.568,7.68 6.568,7.617 6.568,6.89 7.208,6.25 7.939,6.25 v1(7.97,6.22) ; U2.12 5.496,-8.725 5.721,-8.5 5.8,-8.5 v1(7.2,-7.1)
  Bottom Layer w0.15: v1(7.2,-7.1) 7.275,-7.025 7.275,0.59 7.288,0.603 7.288,2.432 7.7,2.844 7.7,5.828 7.97,6.098 v1(7.97,6.22)
GND: C1.1 C2.1 C3.1 C4.1 D1.1 D2.2 D3.2 D4.2 D5.2 D6.1 D7.1 EC1.2 EC2.2 J1.3 J2.1 MH2.1 MH4.1 U1.2 U2.5 | length 77
  Top Layer w0.15: v1(-6.8,0.7) v1@-6.75,0.75
  Top Layer w0.2: v1@-6.75,0.75 -6.75,1.85 -6.65,1.95 D3.2@-6.5,1.95 ; D5.2@6.55,-1.95 6.7,-1.95 7.054,-1.596 7.754,-1.596 7.895,-1.455 7.895,-0.805 EC2.2@8.643,-0.057 ; 6.55,0.75 6.625,0.825 6.625,1.875 D4.2@6.55,1.95 ; EC2.2@8.526,0.174 EC2.2@8.7,0
  Top Layer w0.3: v1(-7.9,-2) -7.881,-1.981 -7.843,-1.943 -7.843,-1.622 -7.819,-1.598 -7.819,0.031 ; C3.1@-2.85,-6.3 -2.675,-6.125 U2.5
  Top Layer w0.45: -6.98,-7.099 -6.981,-7.097 -6.981,-6.038 -6.762,-5.819 -5.584,-5.819 -5.4,-5.635
  Top Layer w0.5: EC1.2@-8.65,-0.002 -8.616,0.031 -7.819,0.031 -7.469,0.031 -6.75,0.75 D6.1 -5.795,0.855 -5.795,1.505 v1@-4.619,2.681 ; v1@-7.881,-1.981 -6.531,-1.981 D2.2@-6.5,-1.95 ; -6.98,-7.099 -6.981,-7.1 -6.981,-7.481 v1(-7,-7.5) -7,-8.732 -6.347,-9.385 -6.106,-9.385 -5.791,-9.7 -5.546,-9.7 -4.591,-10.655 -3.288,-10.655 -2.995,-10.362 -2.995,-9.304 -2.995,-8.826 -2.995,-7.772 -2.85,-7.627 C3.1 ; -5.4,-5.635 -5.394,-5.629 -5.394,-4.479 -5.4,-4.472 -4.95,-4.022 -4.95,-3.473 D1.1 -4.95,-3.373 -4.95,-2.223 -5.2,-1.973 -5.2,-1.919 -5.375,-1.744 v1(-5.375,-1.717) ; v1(-4.6,2.7) -4.6,2.717 -4.605,2.722 -4.581,2.746 -4.581,2.954 -4.494,3.041 -4.494,4.173 -4.259,4.407 -3.328,4.407 -3.325,4.404 -2.556,4.404 -2.371,4.219 -0.919,4.219 v1(-0.9,4.2) ; v1@-0.9,4.013 0.342,4.013 1.048,3.306 1.465,3.306 1.758,3.014 1.758,2.938 2.019,2.678 3.425,2.678 3.625,2.478 5.25,2.478 5.485,2.712 5.485,4.115 5.325,4.275 5.325,4.475 4.95,4.85 C4.1 ; U1.2 3.525,1.218 3.525,2.578 ; C2.1@4.25,-0.6 4.275,-0.625 4.595,-0.305 4.795,-0.305 4.795,-0.205 4.995,-0.205 5.278,0.078 5.45,0.078 5.454,0.081 5.881,0.081 6.55,0.75 6.7,0.6 7.935,0.6 8.418,0.117 8.468,0.117 EC2.2@8.526,0.174 ; C4.1@5.325,4.7 6.073,4.7 6.348,4.425 v1(6.375,4.425)
  Bottom Layer w0.3: 2.325,-10.125 2.35,-10.15
  Bottom Layer w0.5: v1(-7.9,-2) -7.873,-2 -7.59,-1.717 v1(-5.375,-1.717) ; 3.1,-9.1 3.1,-9.127 2.8,-9.427 2.8,-9.7 2.35,-10.15 2.96,-10.15 3.635,-10.825 6.395,-10.825 6.95,-10.27 9.73,-10.27 MH4.1 ; v1(6.375,4.425) 6.375,6.375 MH2.1
  other v1: -2.9,-10.7 -2.85,-7.6 -11.55,0 11.55,0 5.9,0.1
INT: U2.3
JD_DATA: D3.1 D5.1 EC1.1 EC2.1 FB1.1 MH1.1 | length 49.8
  Top Layer w0.15: v1(-6.1,3.7) -5.287,3.7 FB1.1
  Top Layer w0.2: EC1.1@-10.65,1.27 -8.7,1.27 -7.375,2.595 ; MH1.1 -10,8.9 -6.7,5.6 ; D3.1 -6.55,2.75 -6.823,3.023 -6.823,3.223 v1(-6.9,3.3) -7.37,2.83 -7.37,2.67 -7.5,2.8 -7.5,4.8 -6.7,5.6 ; D5.1@6.55,-2.65 6.7,-2.65 D5.1@6.8,-2.75 ; 7.7,4.039 7.7,4.887 6.437,6.15 5.633,6.15 -0.294,6.15 -0.319,6.175 -2.151,6.175 cw(c-2.505,7.4) -2.505,6.125 -6.175,6.125 -6.248,6.052 -6.7,5.6 ; 7.7,4.039 7.7,3.3 8.533,2.467 8.783,2.467 v1(8.85,2.4)
  Top Layer w0.25: D5.1@6.7,-2.65 6.925,-2.425 7.795,-2.425 8.95,-1.27 EC2.1@10.65,-1.27
  Bottom Layer w0.2: 9.511,-0.459 9.511,0.481
  Bottom Layer w0.25: EC1.1@-11.275,-1.272 -10.25,-1.272 -9.55,-0.572 -9.55,0.368 EC1.1@-8.65,1.268 ; v1(-6.9,3.3) -6.805,3.3 -6.472,3.633 -6.167,3.633 v1(-6.1,3.7) ; EC2.1@8.7,-1.27 9.511,-0.459 ; v1(8.85,2.4) 8.917,2.333 9.237,2.333 EC2.1@10.3,1.27 ; 9.511,0.481 EC2.1@10.3,1.27 ; EC2.1@11.325,1.27 EC2.1@10.3,1.27
JD_DATA_MCU: D1.3 R1.2 U2.20 | length 18.7
  Top Layer w0.15: R1.2 -3.768,-0.106 -3.768,-1.241 D1.3 ; R1.2@-3.718,-0.057 -3.718,0.145 -3.669,0.194 -1.5,0.194 -1.369,0.326 -1.369,1.657 -1.381,1.669 -1.381,3 -1.249,3.131 -0.301,3.131 -0.131,2.962 -0.131,1.876 0.185,1.56 0.784,1.56 1.1,1.243 1.1,0.592 2.025,-0.333 2.025,-1.245 2.481,-1.7 2.481,-2.775 2.568,-2.862 2.568,-3.21 2.993,-3.636 4.91,-3.636 U2.20
JD_PWR: C2.2 D2.1 D4.1 EC1.3 EC2.3 MH3.1 U1.1 U1.3 | length 61.3
  Top Layer w0.15: C2.2 C2.2@2.804,-0.704
  Top Layer w0.25: U1.3 4.435,1.328 4.66,1.553 5.164,1.553 6.036,2.425 6.125,2.425 6.35,2.65 D4.1@6.55,2.65
  Top Layer w0.4: 2.685,5.65 2.735,5.7 6.19,5.7
  Top Layer w0.5: MH3.1 -10,-9.2 -7.606,-6.806 -7.606,-5.606 -7.006,-5.006 -7.006,-3.856 -6.9,-3.75 -6.9,-2.7 -6.85,-2.65 -6.8,-2.65 -6.85,-2.7 -8.29,-2.7 -8.7,-2.29 -8.7,-1.322 EC1.3@-8.65,-1.272 ; v1(-6.925,4.302) -6.925,4.321 -5.678,5.568 -4.377,5.6 -2.019,5.6 -1.969,5.65 -0.501,5.65 0.44,5.65 0.965,5.125 v1@2.124,5.125 ; v1(2.171,5.125) 2.171,5.136 2.684,5.65 ; v1(2.5,1.978) 2.517,1.96 2.517,1.195 U1.1 ; v1(2.804,-1.281) C2.2@2.804,-0.704 ; 6.19,5.6 7.2,4.59 7.2,3.761 ; D4.1 7.2,2.75 ; 7.2,3.761 7.2,2.6 7.6,2.6 7.954,2.246 7.954,2.179 8.7,1.432 EC2.3@8.7,1.27
  Bottom Layer w0.2: v1(2.5,1.978) 2.5,-0.4 2.781,-0.681 2.781,-1.258 v1(2.804,-1.281)
  Bottom Layer w0.25: 7.775,-1.653 8.187,-2.065 8.329,-2.065
  Bottom Layer w0.5: EC1.3@-10.302,1.268 -9.189,2.381 -8.769,2.381 -8.75,2.4 -8.418,2.4 -8.349,2.744 -8.32,2.893 -8.212,3 -6.925,4.288 v1(-6.925,4.302) ; EC1.3@-8.65,-1.272 -8.629,-1.272 -7.7,-0.344 -7.7,1.9 -8.181,2.381 ; v1(2.171,5.125) 2.171,3.862 2.121,3.812 2.121,2.651 2.481,2.291 2.481,1.997 v1(2.5,1.978) ; EC2.3@8.7,1.27 8.627,1.27 7.75,0.394 7.75,-1.664 8.213,-2.126 8.213,-2.4 9.17,-2.4 10.3,-1.27 EC2.3@11.575,-1.27
JD_STATUS: R2.1 R3.1 U2.2 | length 20.3
  Top Layer w0.15: R2.1 -5.894,-6.269 -5.362,-6.269 -3.825,-4.732 -3.825,-2.88 -3.253,-2.308 -3.253,-0.897 -2.968,-0.612 -2.929,-0.612 -2.644,-0.327 -2.644,-0.288 -2.481,-0.125 0.968,-0.125 1.1,-0.257 1.1,-0.373 1.199,-0.472 1.199,-2.63 1.43,-2.86 ; U2.2 -0.673,-4.119 0.171,-4.119 1.43,-2.86 ; v1(2.043,-3.079) 2.043,-3.055 1.848,-2.86 1.43,-2.86 ; v1(3.2,-3.1) 3.2,-2.475 R3.1
  Bottom Layer w0.15: v1(2.043,-3.079) 2.053,-3.09 3.19,-3.09 v1(3.2,-3.1)
MISO: J2.6 U2.13 | length 22.3
  Top Layer w0.15: v1(1.896,-8.1) 1.921,-8.075 U2.13
  Bottom Layer w0.15: J2.6 1.216,8.759 1.259,7.44 1.259,7.439 1.325,5.366 1.325,4.434 1.31,4.419 1.215,0.457 1.213,0.397 1.171,0.355 0.868,0.051 0.868,-3.566 1.321,-4.019 1.321,-4.588 1.225,-4.684 1.225,-5.025 1.896,-5.696 v1(1.896,-8.1)
NetC1_2: C1.2 FB1.2 R1.1 | length 3.6
  Top Layer w0.3: R1.1 -4.038,1.713 -4.038,2.122 -3.507,2.652 -3.424,2.652 ; FB1.2 -3.644,3.457 -3.644,2.872 -3.501,2.729 -3.424,2.652 ; C1.2 -2.656,2.696 -3.351,2.696 -3.395,2.652 -3.424,2.652
NetD6_2: D6.2 R2.2 | length 4.7
  Top Layer w0.15: R2.2 -6.425,-4.8 -6.425,-3.425 -6.275,-3.275 -6.057,-3.275 -5.9,-3.118 D6.2
NetD7_2: D7.2 R3.2 | length 2
  Top Layer w0.15: R3.2 5.025,-2.175 5.568,-1.631 5.568,-1.431 5.575,-1.424 5.575,-1.075 D7.2@6.225,-1.075
NetD8_2: D8.2 R6.1 | length 1.6
  Top Layer w0.15: R6.1 -1.826,-0.575 -0.725,-0.575 D8.2
NetD8_3: D8.3 R5.1 | length 2.1
  Top Layer w0.15: R5.1 -0.731,2.457 -0.731,1.856 -1,1.588 -1,1.275 D8.3@-0.5,0.775
NetD8_4: D8.4 R4.1 | length 3.5
  Top Layer w0.15: D8.4 0.55,0.675 1.05,0.175 1.092,0.175 1.4,-0.133 1.4,-0.249 1.499,-0.347 1.499,-1.523 1.569,-1.593 1.569,-1.894 R4.1
nRESET: J1.5 U2.6 | length 7.7
  Top Layer w0.15: v1(-2.295,-9.3) -2.381,-9.214 -2.381,-8.814 -2.52,-8.675 -2.52,-8.023 -1.497,-7 -1.429,-7 -1.204,-6.775 U2.6
  Bottom Layer w0.15: J1.5 -4.17,-10.97 -3.68,-10.48 -3.627,-10.48 -3.106,-9.96 -3.106,-9.906 -2.586,-9.386 -2.381,-9.386 v1(-2.295,-9.3)
PWM: J2.9 U2.11 | length 18.1
  Top Layer w0.15: v1(3.896,-8.8) 3.903,-8.8 4.253,-9.15 4.321,-9.15 4.546,-9.375 U2.11
  Bottom Layer w0.15: v1(3.896,-8.8) 3.896,-4.366 5,-3.261 5,7.285 J2.9
RGB_B: R4.2 U2.1 | length 2.4
  Top Layer w0.15: U2.1 0.171,-3.525 0.495,-3.201 0.495,-2.369 R4.2
RGB_G: R5.2 U2.14 | length 15.2
  Top Layer w0.15: R5.2 0.775,2.475 1.7,1.549 1.7,0.844 2.091,0.453 3.24,0.453 3.625,0.067 3.625,-1.143 3.75,-1.269 4.074,-1.269 4.392,-1.587 4.392,-2.673 4.605,-2.886 5.574,-2.886 7.15,-4.461 7.15,-5.839 5.789,-7.2 5.721,-7.2 5.496,-7.425 U2.14
RGB_R: R6.2 U2.15 | length 19.9
  Top Layer w0.15: R6.2 -1.987,0.8 -1.681,1.106 -1.681,3.144 -1.286,3.538 -0.114,3.538 0.169,3.256 0.169,2 0.301,1.869 0.899,1.869 1.4,1.367 1.4,0.716 1.816,0.3 1.82,0.3 1.973,0.147 3.122,0.147 3.275,-0.007 3.275,-0.038 3.325,-0.088 3.325,-1.217 3.329,-1.221 3.329,-1.278 3.62,-1.569 3.95,-1.569 4.081,-1.7 4.081,-2.7 4.036,-2.745 4.036,-3.025 v1(3.95,-3.111) ; v1(3.371,-6.8) 3.383,-6.787 5.008,-6.787 U2.15
  Bottom Layer w0.15: v1(3.371,-6.8) 2.846,-6.275 2.846,-4.296 2.921,-4.221 2.921,-4.122 3.932,-3.111 v1(3.95,-3.111)
RST: U2.7
RX/CS: J2.7 U2.10 | length 18.9
  Top Layer w0.15: U2.10 -0.254,-9.375 -0.029,-9.15 0.039,-9.15 0.171,-9.018 0.171,-8.792 0.771,-8.192 0.771,-7.535 1.1,-7.206 1.1,-5.838 1.469,-5.469 1.469,-5.304 1.797,-4.976 v1(1.797,-4.854)
  Bottom Layer w0.15: 1.625,5.49 1.625,4.31 1.521,0.339 1.52,0.28 1.478,0.237 1.168,-0.073 1.168,-3.442 1.797,-4.071 v1(1.797,-4.854) ; 1.625,5.491 1.61,6.31 1.61,6.435 J2.7
SCK: J2.3 U2.8 | length 18.5
  Top Layer w0.15: U2.8 -0.254,-8.075 -0.029,-7.85 0.039,-7.85 0.171,-7.718 0.171,-7.24 0.5,-6.91 0.5,-5.131 0.614,-5.018 0.472,-4.876 v1(0.403,-4.876)
  Bottom Layer w0.15: J2.3 -2.505,7.1 -2.208,6.803 0.417,5.425 0.725,5.117 0.725,4.683 0.66,4.618 0.6,1.952 0.6,1.949 0.6,1.118 0.268,0.785 0.268,-4.451 0.317,-4.501 0.317,-4.79 v1(0.403,-4.876)
SCL: J2.8 U2.16 | length 24.8
  Top Layer w0.15: J2.8 2.929,10.294 3.737,10.294 4.608,11.165 5.622,11.165 6.34,10.447 6.34,8.91 v1(8.5,6.75) ; U2.16 5.096,-6.2 6.104,-6.2 6.187,-6.117 6.534,-5.615 v1(6.625,-5.615)
  Bottom Layer w0.15: v1(6.625,-5.615) 6.625,-5.578 6.9,-5.303 6.9,2.6 7.4,3.1 7.4,6.4 7.842,6.842 7.992,6.842 7.998,6.836 8.414,6.836 v1(8.5,6.75)
SDA: J2.10 U2.17 | length 18.4
  Top Layer w0.15: v1(3.371,-5.429) 3.394,-5.452 4.998,-5.452 U2.17
  Bottom Layer w0.15: v1(3.371,-5.429) 3.371,-4.466 4.7,-3.137 4.7,1.249 3.89,2.059 3.89,7.907 4.761,8.778 4.761,9.586 J2.10
SWCLK: J1.4 U2.19 | length 13.4
  Top Layer w0.15: v1(0.55,-9.382) 0.55,-9.26 0.74,-9.069 0.74,-8.94 1.071,-8.609 1.071,-7.659 1.4,-7.33 1.4,-6.233 3.108,-4.525 3.276,-4.525 3.576,-4.225 3.889,-4.225 3.939,-4.175 U2.19
  Bottom Layer w0.15: J1.4 -2.925,-8.675 -2.025,-8.675 v1@-1.914,-8.786 ; v1(-1.854,-8.668) -1.879,-8.693 -1.879,-8.821 -1.726,-8.668 -0.164,-8.668 v1(0.55,-9.382)
SWDIO: J1.2 U2.18 | length 13.2
  Top Layer w0.15: v1(1.265,-9.157) 1.265,-9.035 1.453,-8.847 1.453,-8.741 1.535,-8.659 1.535,-8.517 1.371,-8.353 1.371,-7.784 2.749,-6.405 2.749,-5.308 3.232,-4.825 U2.18
  Bottom Layer w0.15: J1.2 -3.895,-8.375 -2.304,-8.375 -2.072,-8.143 0.251,-8.143 1.316,-9.208 v1@1.4,-9.208 ; v1(1.265,-9.157) v1@1.4,-9.157 ; v1@1.367,-9.375 v1@1.367,-9.259
TX/MOSI: J2.5 U2.9 | length 17.9
  Top Layer w0.15: U2.9 -0.254,-8.725 -0.029,-8.5 0.039,-8.5 0.471,-8.068 0.471,-7.411 0.8,-7.082 0.8,-5.713 1.056,-5.457 1.056,-4.551 0.796,-4.291 v1(0.796,-4.237)
  Bottom Layer w0.15: J2.5 0.916,6.519 1.025,5.242 1.025,4.558 0.96,4.493 0.901,1.054 0.9,0.993 0.568,0.661 0.568,-3.887 0.796,-4.115 v1(0.796,-4.237)
pads on no net: EC1. EC2. U1.4

## Polygon pours and split planes (outlines as drawn)
no net on Bottom Assy "NONET_L-01_P-001" (hatched 45Degree grid 0.3 track 0.01): -12.513,-10 -12.513,-7.018 -12.505,-7 cw(c-11.5,-7) -11.5,-5.995 -9.1,-5.995 ccw(c-9.1,-5) -8.105,-5 -8.105,-4.301 -8.105,-4.3 ccw(c-9.1,-4.3) -9.1,-3.305 -13.2,-3.305 cw(c-13.2,-2.5) -14.005,-2.5 -14.005,2.5 cw(c-13.2,2.5) -13.201,3.305 -13.2,3.305 -9.1,3.305 ccw(c-9.1,4.3) -8.105,4.3 -8.105,4.301 -8.105,5 ccw(c-9.1,5) -9.1,5.995 -11.5,5.995 cw(c-11.5,7) -12.505,6.991 -12.513,7.003 -12.513,10 cw(c-10,10) -10.002,12.513 -10,12.513 -7.729,12.513 -7.724,12.512 cw(c-7.75,12.25) -7.487,12.25 -7.487,12 -7.487,11.999 ccw(c-6.5,12) -6.657,11.025 -6.638,11.018 cw(c-10,10) -6.487,10 cw(c-10,10) -6.987,8.194 -6.987,-8.194 cw(c-10,-10) -6.487,-10 cw(c-10,-10) -6.629,-10.987 6.629,-10.987 cw(c10,-10) 6.987,-8.194 6.987,8.194 cw(c10,10) 6.629,10.987 -6.5,10.987 -6.497,11.013 ccw(c-6.5,12) -5.513,11.999 -5.513,12 -5.513,12.25 -5.513,12.251 cw(c-5.25,12.25) -5.25,12.513 -5.249,12.513 10,12.513 10.001,12.513 cw(c10,10) 12.513,10 12.513,6.966 12.504,6.954 cw(c11.5,7) 11.5,5.995 9.1,5.995 ccw(c9.1,5) 8.105,5 8.105,4.301 8.105,4.3 ccw(c9.1,4.3) 9.1,3.305 13.2,3.305 13.201,3.305 cw(c13.2,2.5) 14.005,2.5 14.005,-2.5 cw(c13.2,-2.5) 13.2,-3.305 9.1,-3.305 ccw(c9.1,-4.3) 8.105,-4.3 8.105,-4.301 8.105,-5 ccw(c9.1,-5) 9.1,-5.995 11.5,-5.995 cw(c11.5,-7) 12.505,-6.962 12.513,-6.974 12.513,-10 cw(c10,-10) 10.001,-12.513 10,-12.513 -7.729,-12.513 -7.73,-12.513 -10,-12.513 -10.002,-12.513 cw(c-10,-10)
no net on Bottom Assy "NONET_L-01_P-001" (hatched 45Degree grid 0.15 track 0.01): 9.3,-2.88 13.2,-2.88 ccw(c13.2,-2.48) 13.6,-2.48 13.6,-2.478 13.6,2.465 13.6,2.462 ccw(c13.2,2.462) 13.2,2.862 13.198,2.862 9.3,2.862
no net on Bottom Assy "NONET_L-01_P-001" (hatched 45Degree grid 0.15 track 0.01): 12.5,8.342 cw(c10,10) 8.342,12.5 10,12.5 cw(c10,10) 12.5,10
no net on Bottom Assy "NONET_L-01_P-001" (hatched 45Degree grid 0.15 track 0.01): -12.5,8.342 ccw(c-10,10) -8.342,12.5 -10,12.5 ccw(c-10,10) -12.5,10
no net on Bottom Assy "NONET_L-01_P-001" (hatched 45Degree grid 0.15 track 0.01): -9.3,-2.868 -13.2,-2.868 cw(c-13.2,-2.468) -13.6,-2.468 -13.6,-2.466 -13.6,2.477 -13.6,2.474 cw(c-13.2,2.474) -13.2,2.874 -13.198,2.874 -9.3,2.874
no net on Bottom Assy "NONET_L-01_P-001" (hatched 45Degree grid 0.15 track 0.01): -12.5,-8.342 cw(c-10,-10) -8.342,-12.5 -10,-12.5 cw(c-10,-10) -12.5,-10
no net on Bottom Assy "NONET_L-01_P-001" (hatched 45Degree grid 0.15 track 0.01): 12.5,-8.342 ccw(c10,-10) 8.342,-12.5 10,-12.5 ccw(c10,-10) 12.5,-10
no net on Fabrication notes "NONET_L-01_P-001" (hatched 45Degree grid 0.6 track 0.01): -14.5,-7 -8,-7 -7.988,-7 -7.989,7.01 -8,7 -14.5,7 -14.489,7.01
no net on Fabrication notes "NONET_L-01_P-001" (hatched 45Degree grid 0.6 track 0.01): 14.5,-7 8,-7 7.988,-7 7.989,7.01 8,7 14.5,7 14.489,7.01
GND on Bottom Layer "GND_L02_P000" (solid, pour order 0): -12.5,12.6 -12.5,6 -8.724,6 -8.675,5.951 -8.7,5.926 -8.7,-6 -12.4,-6 -12.5,-5.9 -12.6,-6 -12.6,-12.4 12.5,-12.4 12.6,-12.3 12.6,-5.9 8.7,-5.9 8.5,-5.7 8.5,6 12.5,6 12.6,6.1 12.6,12.6

## Keep-outs
Keep-Out Layer:
  region: 12.4,11.5 12.4,12.5 -12.6,12.5 -12.6,11.5
  region: 12.5,-12.5 12.5,-11.5 -12.5,-11.5 -12.5,-12.5

## Other copper
Top Layer:
  region net JD_DATA: -12.215,7.8 -9.9,7.8 -7.8,9.9 -7.8,12.215 -9.985,12.215 -12.215,9.985
  text "Top Layer" at 15.001,-5.35 h1.7
Bottom Layer:
  text "Bottom Layer" at 15,-6.85 h1.7

## Silkscreen, mask and mechanical layers (free items; w line width, h text height)
Top Overlay:
  lines w0.1: -9.374,-6.607 cw(c-10,-10) -8.399,-6.944 ccw(c-8.206,-7.72) -9.003,-7.653 ; -9.374,6.607 ccw(c-10,10) -8.399,6.944 cw(c-8.206,7.72) -9.003,7.653 ; -9.352,-6.612 ccw(c-9.446,-7.052) -9.539,-7.492 cw(c-10,-10) -9.027,-7.643 ; -9.352,6.612 cw(c-9.446,7.052) -9.539,7.492 ccw(c-10,10) -9.027,7.643 ; -7.653,-9.003 ccw(c-7.72,-8.206) -6.944,-8.399 cw(c-10,-10) -6.607,-9.374 ; -7.653,9.003 cw(c-7.72,8.206) -6.944,8.399 ccw(c-10,10) -6.607,9.374 ; -7.643,-9.027 cw(c-10,-10) -7.492,-9.539 ccw(c-7.052,-9.446) -6.612,-9.352 ; -7.643,9.027 ccw(c-10,10) -7.492,9.539 cw(c-7.052,9.446) -6.612,9.352 ; 6.607,-9.374 cw(c10,-10) 6.944,-8.399 ccw(c7.72,-8.206) 7.653,-9.003 ; 6.607,9.374 ccw(c10,10) 6.944,8.399 cw(c7.72,8.206) 7.653,9.003 ; 6.612,-9.352 ccw(c7.052,-9.446) 7.492,-9.539 cw(c10,-10) 7.643,-9.027 ; 6.612,9.352 cw(c7.052,9.446) 7.492,9.539 ccw(c10,10) 7.643,9.027 ; 9.003,-7.653 ccw(c8.206,-7.72) 8.399,-6.944 cw(c10,-10) 9.374,-6.607 ; 9.003,7.653 cw(c8.206,7.72) 8.399,6.944 ccw(c10,10) 9.374,6.607 ; 9.027,-7.643 cw(c10,-10) 9.539,-7.492 ccw(c9.446,-7.052) 9.352,-6.612 ; 9.027,7.643 ccw(c10,10) 9.539,7.492 cw(c9.446,7.052) 9.352,6.612
  lines w0.2: -8.352,7.884 -8.366,7.484 ; -7.973,7.408 -8.366,7.484 ; -7.883,8.345 -7.484,8.366 ; -7.401,7.975 -7.484,8.366 ; -8.366,7.484 ccw(c-10,10) -7.484,8.366
  lines w0.33: -9.1,-7.445 cw(c-8.759,-7.302) -8.685,-6.94 ; -9.1,7.445 ccw(c-8.759,7.302) -8.685,6.94 ; -7.445,-9.1 ccw(c-7.302,-8.759) -6.94,-8.685 ; -7.445,9.1 cw(c-7.302,8.759) -6.94,8.685 ; 6.94,-8.685 ccw(c7.302,-8.759) 7.445,-9.1 ; 6.94,8.685 cw(c7.302,8.759) 7.445,9.1 ; 8.685,-6.94 cw(c8.759,-7.302) 9.101,-7.445 ; 8.685,6.94 ccw(c8.759,7.302) 9.1,7.445
  lines w1: -9.43,-7.055 cw(c-10,-10) -9.285,-7.086 ; -9.43,7.055 ccw(c-10,10) -9.285,7.086 ; -7.086,-9.285 cw(c-10,-10) -7.055,-9.43 ; -7.086,9.285 ccw(c-10,10) -7.055,9.43 ; 7.055,-9.43 cw(c10,-10) 7.086,-9.285 ; 7.055,9.43 ccw(c10,10) 7.086,9.285 ; 9.285,-7.086 cw(c10,-10) 9.43,-7.055 ; 9.285,7.086 ccw(c10,10) 9.43,7.055
  text "MSR" at -1.172,11.27 h0.9
  text "-" at 8.643,8.146 h3.5 r135
  text "-" at 8.146,-8.643 h3.5 r45
  text "+" at -7.95,-8.67 h2.8 r315
  text "Top Overlay" at 15.001,-11.075 h1.7
  text "Developer RGB" at -4.306,-11.83 h0.9
Bottom Overlay:
  drawing of 246 lines, arcs and shapes, not listed
  text "-" at 8.643,8.146 h3.5 r135
  text "MISO" at 0.508,5.518 h0.9 r90
  text "3V3" at -4.572,5.202 h0.9 r90
  text "SDA" at 5.588,5.188 h0.9 r90
  text "SCL" at 3.048,5.111 h0.9 r90
  text "AN" at -2.032,4.495 h0.9 r90
  text "GND" at -4.572,1.824 h0.9 r90
  text "SCK" at -2.032,1.824 h0.9 r90
  text "TX/MOSI" at 0.508,1.824 h0.9 r90
  text "RX/CS" at 3.048,1.824 h0.9 r90
  text "PWM" at 5.588,1.824 h0.9 r90
  text "'.ProjectCodenameID'" at -4.134,-5 h1
  text "Bottom Overlay" at 23.6,-5.375 h1.7
  text "-'.ProjectRevision'" at -3.767,-6.5 h1
  text "-" at 8.146,-8.643 h3.5 r45
  text "+" at -7.95,-8.67 h2.8 r315
Top Paste:
  text "Top Paste" at 23.601,-6.782 h1.7
Bottom Paste:
  text "Bottom Paste" at 23.6,-8.26 h1.7
Top Solder:
  text "Top Solder (resist)" at 23.601,-9.582 h1.7
Bottom Solder:
  text "Bottom Solder (resist)" at 23.6,-11.073 h1.7
Drill Guide:
  text "Drill Guide" at 37.025,-9.585 h1.7
Dimension:
  text "Dimension" at 37.025,-8.285 h1.7
Fabrication notes:
  lines w0.01: -14.5,-7 -8,-7 ; -14.5,7 -8,7 ; -14.489,7.01 -14.488,-7 ; -7.989,7.01 -7.988,-7 ; 7.988,-7 7.989,7.01 ; 8,-7 14.5,-7 ; 8,7 14.5,7 ; 14.488,-7 14.489,7.01
  lines w0.2: -16.25,-0.2 -12.4,-2.5 -10.65,-2.5 ; -16.25,0.2 -12.4,2.5 -10.65,2.5 ; -16.25,6 -14.5,6 ; 10.65,-2.5 12.4,-2.5 16.25,-0.2 ; 10.65,2.5 12.4,2.5 16.25,0.2 ; 14.5,6 16.25,6
  text "no board edge pips/ / rat's teeth/mouse bites  / in this region - make  / sure board edge is clean" at -32.397,4 h1.7
  text "no board edge pips/ / rat's teeth/mouse bites  / in this region - make  / sure board edge is clean" at 16.6,4 h1.7